# Altium PCB PCB1.PcbDoc
Units mm, origin at the board's own origin, x right, y up, seen from the top; angles counter-clockwise.
Board outline 26.5 x 23.33 mm, 2 copper layers (Top Layer, Bottom Layer); 23 components, 16 nets, 102 pads, 141 vias.
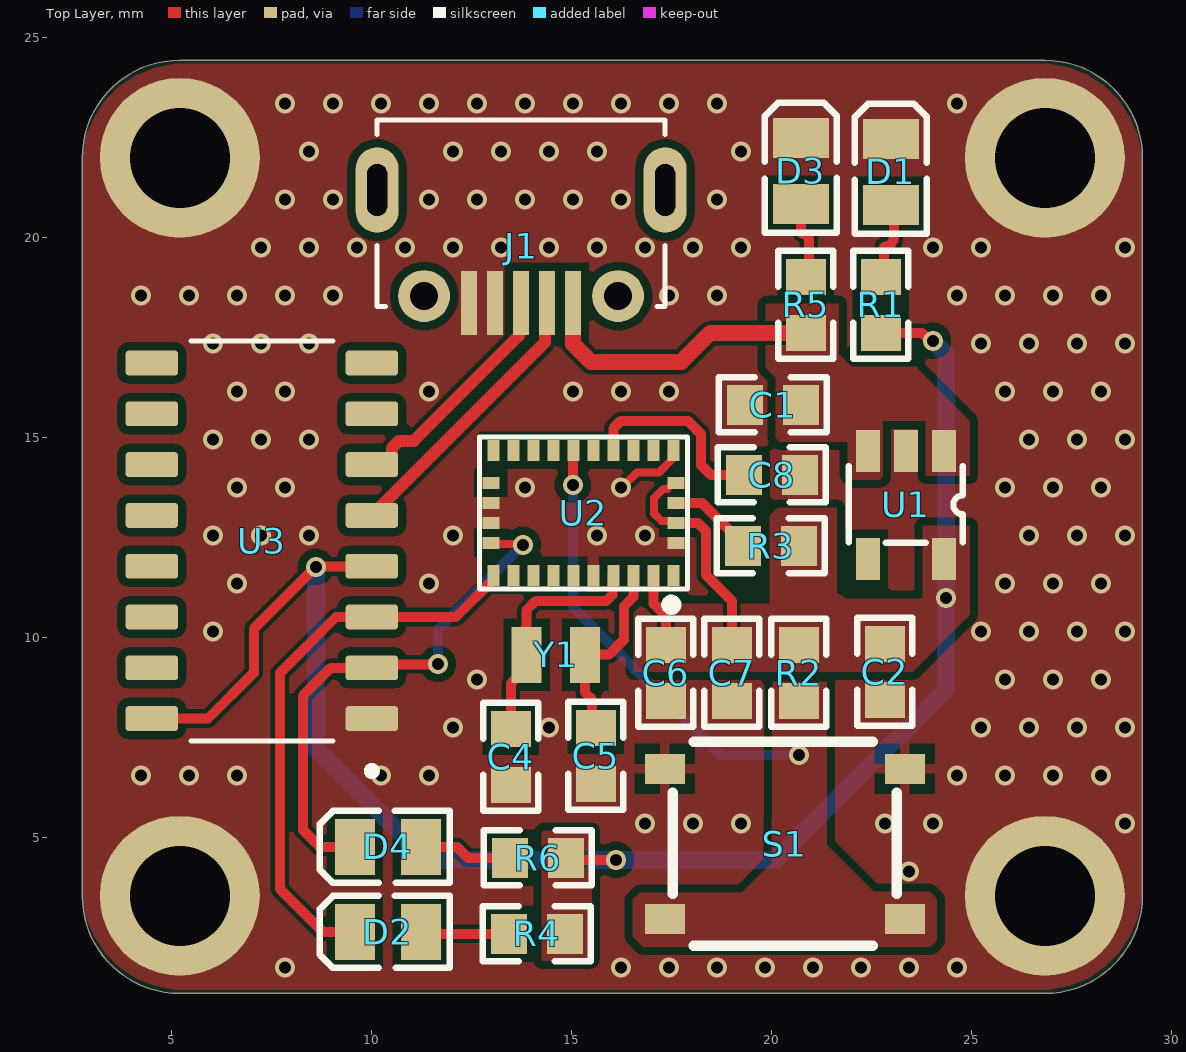
[diagram p0: Top Layer view]
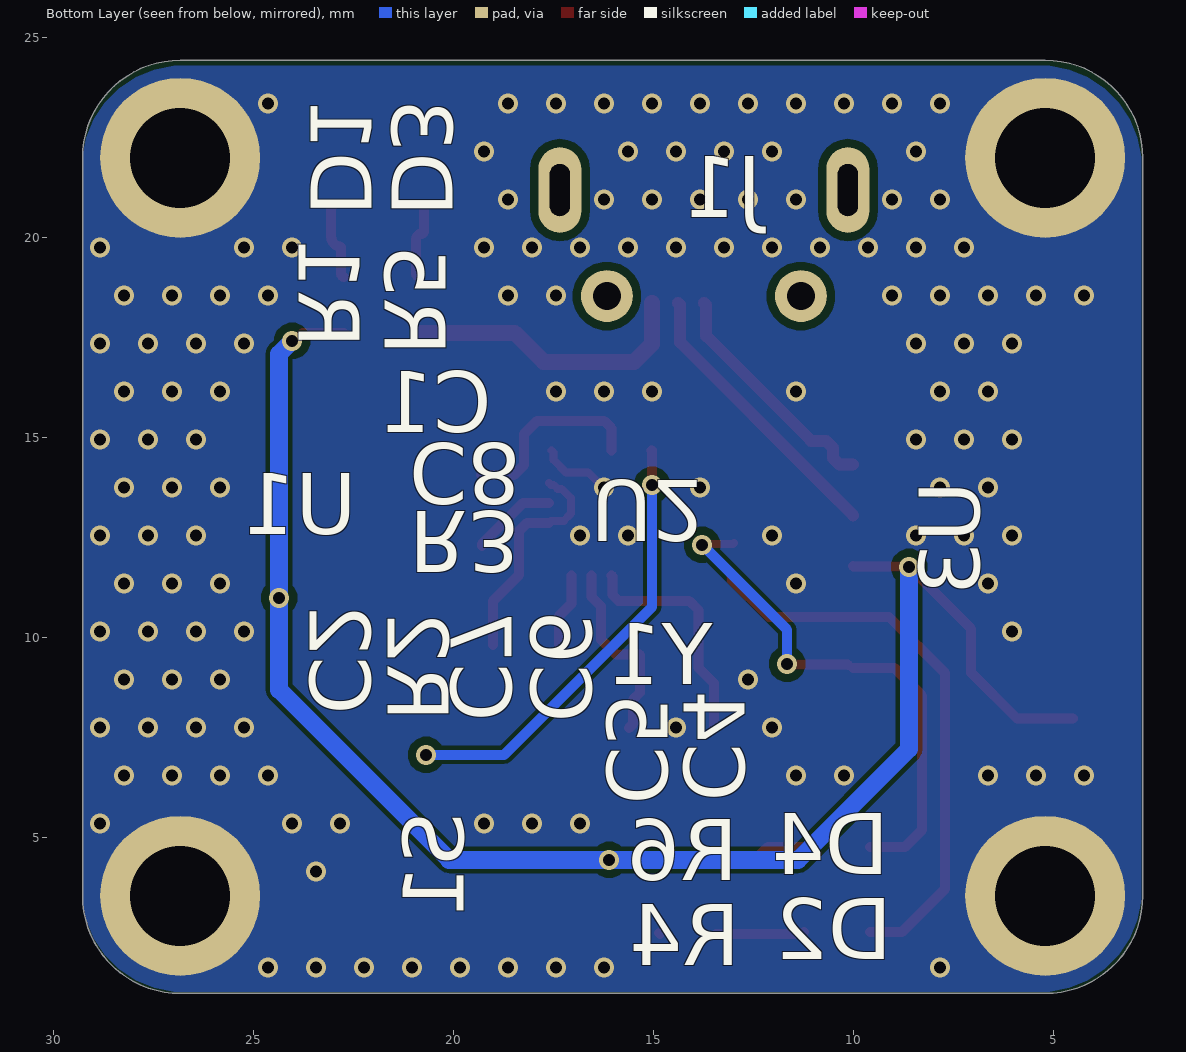
[diagram p1: Bottom Layer view, seen from below]
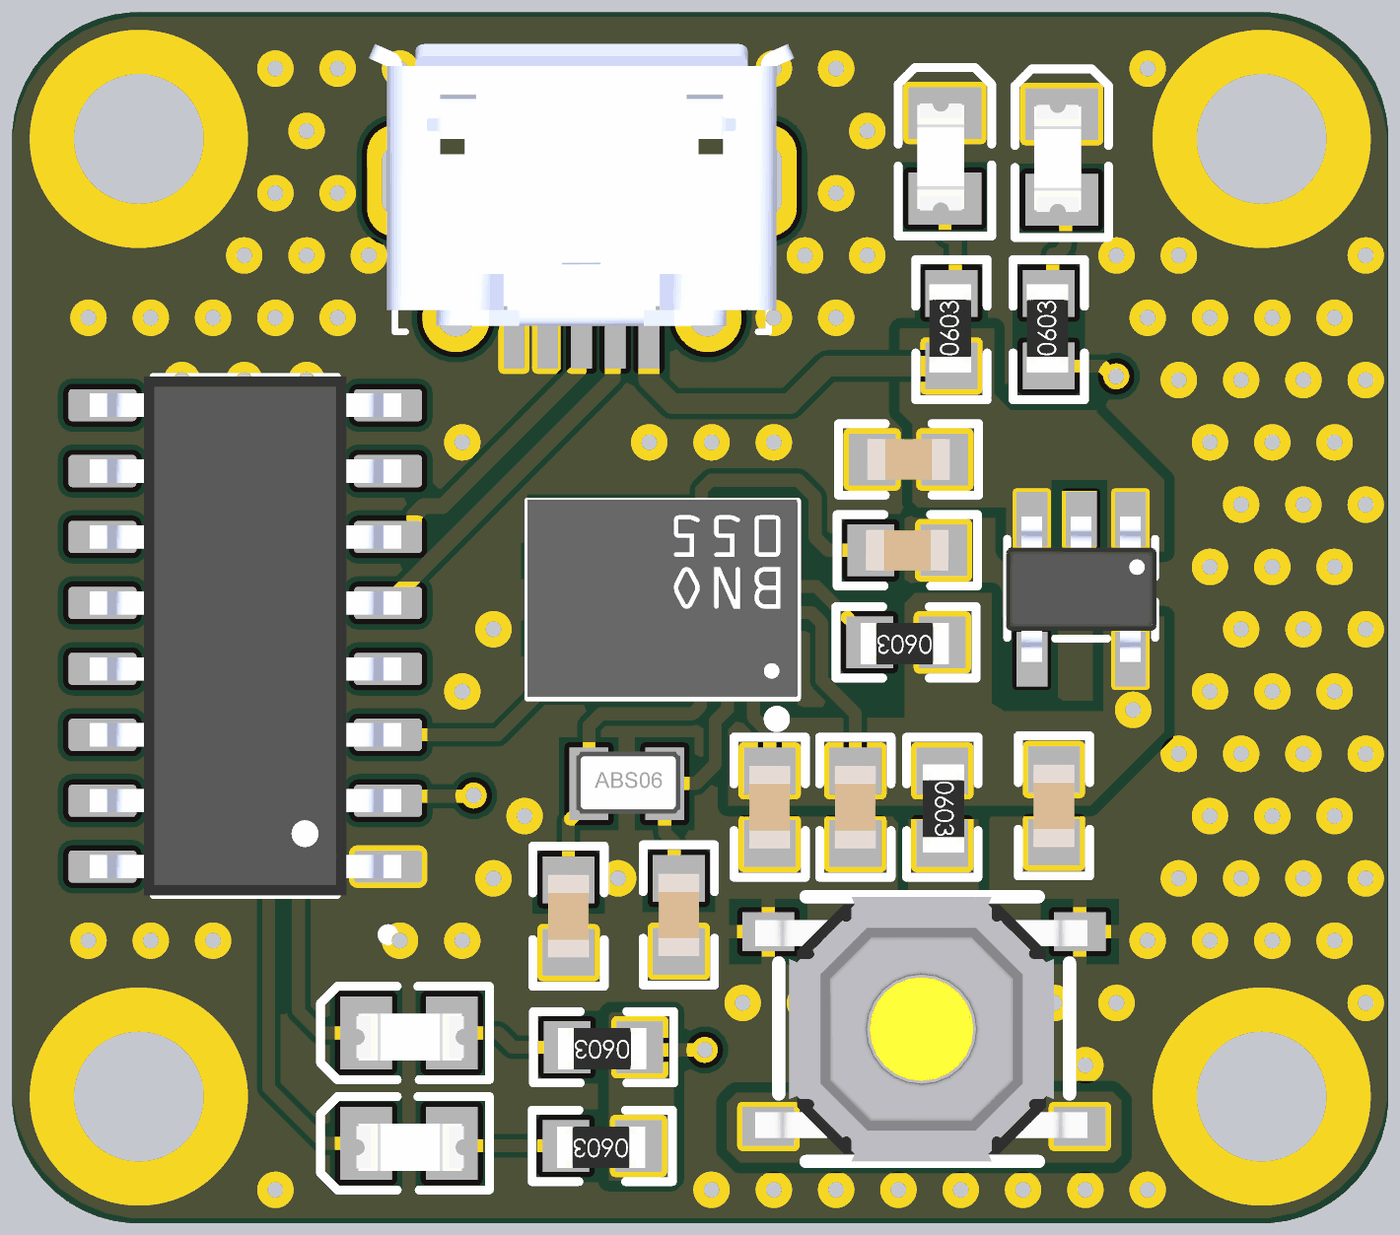
[diagram p2: 3D render of the assembled board from above, using the file's embedded part models]

## Layer stack, top to bottom
Top Solder: solder mask 0.0102, Solder Resist, Dk 3.5
Top Layer: signal copper 0.0356
Dielectric 1: dielectric 0.32, FR-4, Dk 4.8
Bottom Layer: signal copper 0.0356
Bottom Solder: solder mask 0.0102, Solder Resist, Dk 3.5

## Board outline
2.761,3.55 2.761,22 cw(c5.2,22) 5.2,24.439 26.825,24.439 cw(c26.825,22) 29.264,22 29.264,3.55 cw(c26.825,3.55) 26.825,1.111 5.2,1.111 cw(c5.2,3.55)

## Design rules (kind name [scope] priority, off if disabled: settings)
Clearance Clearance_1 [OnMid vs OnMid] p1: gap=0.2 ignorepadtopadclearanceinfootprint=FALSE except(0.1: Arc-SMDPad Arc-THPad Arc-Fill Arc-Poly Arc-Region Track-SMDPad Track-THPad Track-Fill Track-Poly Track-Region SMDPad-Text THPad-Text Fill-Text Poly-Text Region-Text; 0.15: Arc-Hole Track-Hole SMDPad-SMDPad Text-Hole; 0.16: Arc-Arc Arc-Track Arc-Text Track-Track Track-Text Text-Text; 0.254: Hole-Hole) sourcerule=36 cellrowname=All cellrowtype=0 cellcolname=All cellcoltype=0 innerlayers=TRUE
Clearance Clearance_2 [(ExistsOnLayer('Top Layer') Or ExistsOnLayer('Bottom Layer')) vs (ExistsOnLayer('Top Layer') Or ExistsOnLayer('Bottom Layer'))] p2: gap=0.2 ignorepadtopadclearanceinfootprint=FALSE except(0.1: Arc-SMDPad Arc-THPad Arc-Fill Arc-Poly Arc-Region Track-SMDPad Track-THPad Track-Fill Track-Poly Track-Region SMDPad-Text THPad-Text Fill-Text Poly-Text Region-Text; 0.15: Arc-Hole Track-Hole SMDPad-SMDPad Text-Hole; 0.16: Arc-Arc Arc-Track Arc-Text Track-Track Track-Text Text-Text; 0.254: Hole-Hole) sourcerule=36 cellrowname=All cellrowtype=0 cellcolname=All cellcoltype=0 outerlayers=TRUE
Clearance [All] p3: gap=0.254 ignorepadtopadclearanceinfootprint=FALSE ismatrix=TRUE
DiffPairsRouting [All] p1: maxlimit=1 minlimit=0.1 mostfreqgap=0.2 toplayer_minwidth=0.1 toplayer_maxwidth=1 toplayer_prefwidth=0.3 bottomlayer_minwidth=0.1 bottomlayer_maxwidth=1 bottomlayer_prefwidth=0.3 maxuncoupledlength=12.7
MinimumSolderMaskSliver [All] p1: minsoldermaskwidth=0.1
PolygonConnect [All] p1: connectstyle=Direct reliefconductorwidth=0.254 reliefentries=4 polygonreliefangle="90 Angle" airgapwidth=0.254
RoutingVias [All] p1: holewidth=0.3 width=0.5 viastyle="Through Hole" minholewidth=0.3 minwidth=0.5 maxholewidth=0.3 maxwidth=0.5
SolderMaskExpansion [All] p1: expansion=0.102 istentingtop=FALSE
Width [All] p1: maxlimit=1 minlimit=0.16 preferedwidth=0.3 minimp=50.000000 maximp=50.000000 favimp=50.000000
28 further rules are at their usual default settings.

## Classes and differential pairs
differential pair D_D: +D_P -D_N

## Components (designator, comment, footprint, x,y, rotation, side; value= is the part's Value field where it differs from the comment)
C1 "1uF" "0603 cap" 19.925,15.825 r0 top
C2 "1uF" "0603 cap" 22.825,9.05 r90 top
C4 "22pF" "0603 cap" 13.475,6.925 r90 top
C5 "22pF" "0603 cap" 15.6,6.95 r90 top
C6 "100nF" "0603 cap" 17.35,9.025 r90 top
C7 "100nF" "0603 cap" 19,9.025 r90 top
C8 "1uF" "0603 cap" 19.9,14.075 r0 top
D1 "Led green" 0805led 22.975,21.725 r270 top
D2 "Led green" 0805led 10.325,2.65 r0 top
D3 "Led green" 0805led 20.725,21.75 r270 top
D4 "Led green" 0805led 10.325,4.775 r0 top
J1 "4 PINS" "Micro USB" 13.625,20.375 r0 top
R1 "1k" "0603 RES" 22.725,18.225 r90 top
R2 "10k" "0603 RES" 20.675,9.225 r270 top
R3 "10k" "0603 RES" 20.075,12.3 r180 top
R4 "1k" "0603 RES" 14.225,2.6 r180 top
R5 "1k" "0603 RES" 20.85,18.225 r90 top
R6 "1k" "0603 RES" 14.25,4.5 r180 top
S1 "tactile button" button 20.325,4.85 r0 top
U1 "TPTLV74333PDBVR" SOT-23 23.35,13.325 r270 top
U2 "BNO055" LGA28R50P4X10_380X520X100 15.288,13.125 r180 top
U3 "CH340C" "sop 16" 7.25,12.425 r180 top
Y1 "32khz" XTAL_ABS06-107-32.768KHZ-T 14.6,9.575 r0 top

## Footprints (in the part's own frame and the unit in brackets; to place one, negate y for a bottom-side part, rotate by r counter-clockwise, add the part's x,y. Pads: shape width x height; smd on the part's side, far side on the other; paste and mask are expansions set on the pad)
"0603 cap" [mm]
  rect 0.9x1 smd: 1(-0.6,0) 2(0.8,0)
  silkscreen extent -1.25,-0.69 1.45,0.69, body extent -0.7,-0.4 0.9,0.4, height 0.8
"0603 RES" [mm]
  rect 0.9x1 smd: 1(-0.6,0) 2(0.8,0)
  silkscreen extent -1.25,-0.69 1.45,0.69, body extent -0.73,-0.38 0.98,0.43, height 0.56
0805led [mm]
  rect 1x1.4 smd: 1(0.9,0) 2(-0.75,0)
  silkscreen extent -1.63,-0.9 1.63,0.9, body extent -0.93,-0.53 1.13,0.38, height 0.85
button [mm]
  rect 1x0.75 smd: A(-3,1.875) B(3,1.875) C(-3,-1.875) D(3,-1.875)
  silkscreen extent -2.8,-2.55 2.8,2.55, body extent -3.25,-2.55 3.15,2.55, height 1.5
LGA28R50P4X10_380X520X100 [mm]
  rect 0.3x0.525 smd mask+0.05: 1(-2.25,1.562) 6(-2.25,-1.562) 7(-1.75,-1.562) 8(-1.25,-1.562) 9(-0.75,-1.562) 10(-0.25,-1.562) 11(0.25,-1.562) 12(0.75,-1.562) 13(1.25,-1.562) 14(1.75,-1.562) 15(2.25,-1.562) 20(2.25,1.562) 21(1.75,1.562) 22(1.25,1.562) 23(0.75,1.562) 24(0.25,1.562) 25(-0.25,1.562) 26(-0.75,1.562) 27(-1.25,1.562) 28(-1.75,1.562)
  rect 0.425x0.3 smd mask+0.05: 2(-2.312,0.75) 3(-2.312,0.25) 4(-2.312,-0.25) 5(-2.312,-0.75) 16(2.313,-0.75) 17(2.312,-0.25) 18(2.312,0.25) 19(2.313,0.75)
  silkscreen extent -2.6,-1.9 2.6,2.4, body extent -2.6,-1.92 2.6,1.88, height 1.18
"Micro USB" [mm]
  rect 0.4x1.6 smd: 1(1.4,-2) 2(0.75,-2) 3(0.1,-2) 4(-0.55,-2) 5(-1.2,-2)
  round 1.3 hole 0.7: S1(-2.317,-1.831) S2(2.533,-1.831)
  oval 1.07x2.14 hole 0.5 slot 1.3 at 90 deg: S3(-3.492,0.819) S4(3.708,0.819)
  silkscreen extent -3.49,-2.09 3.71,2.57, body extent -4,-1.97 4.2,3.46, height 2.68
"sop 16" [mm]
  rrect25% 1.31x0.62 smd: 1(-2.75,4.445) 2(-2.75,3.175) 3(-2.75,1.905) 4(-2.75,0.635) 5(-2.75,-0.635) 6(-2.75,-1.905) 7(-2.75,-3.175) 8(-2.75,-4.445) 9(2.75,-4.445) 10(2.75,-3.175) 11(2.75,-1.905) 12(2.75,-0.635) 13(2.75,0.635) 14(2.75,1.905) 15(2.75,3.175) 16(2.75,4.445)
  silkscreen extent -2.85,-5 1.78,5.85, body extent -3,-5 3,5, height 1.8
SOT-23 [mm]
  rect 1.05x0.6 smd mask+0.07: 1(-1.35,0.95) 2(-1.35,0) 3(-1.35,-0.95) 4(1.35,-0.95) 5(1.35,0.95)
  silkscreen extent -0.97,-1.43 0.95,1.43, body extent -1.4,-1.45 1.4,1.45, height 1.45
XTAL_ABS06-107-32.768KHZ-T [mm]
  rect 0.75x1.4 smd: 1(-0.73,0) 2(0.73,0)
  body extent -0.98,-0.58 1.03,0.62, height 0.61

## Part data
C1 C2 C8: "25V 1uF X7R ±10% 0603 Multilayer Ceramic Capacitors MLCC - SMD/SMT ROHS", LCSC Part #=C525333, Manufacturer="PSA(Prosperity Dielectrics)", Mfr. Part #=FS18X105K250PBG, supplier=LCSC
C4 C5: library part "22pF capacitor", "50V 22pF C0G ±5% 0603 Multilayer Ceramic Capacitors MLCC - SMD/SMT ROHS", LCSC Part #=C525244, Manufacturer="PSA(Prosperity Dielectrics)", Mfr. Part #=FN18N220J500PSG, supplier=LCSC
C6 C7: library part "100nF capacitor", "50V 100nF X7R ±10% 0603 Multilayer Ceramic Capacitors MLCC - SMD/SMT ROHS", LCSC Part #=C235731, Manufacturer="PSA(Prosperity Dielectrics)", Mfr. Part #=FN18X104K500PBG, supplier=LCSC
D1 D2 D3 D4: "Emerald 0805 Light Emitting Diodes (LED) ROHS", LCSC Part #=C434432, Manufacturer="Yongyu Photoelectric", Mfr. Part #=SZYY0805G, supplier=LCSC
J1: library part "Micro USB", "1.8A USB 2.0 1 Horizontal attachment 5P Mother -20℃~+85℃ Micro-B SMD USB Connectors ROHS", LCSC Part #=C404969, Manufacturer="SHOU HAN", Mfr. Part #=MicroXNJ, supplier=LCSC
R1 R4 R5 R6: library part "1k resistor", "100mW Thick Film Resistors 75V ±100ppm/℃ ±1% 1kΩ 0603 Chip Resistor - Surface Mount ROHS", LCSC Part #=C21190, Manufacturer="UNI-ROYAL(Uniroyal Elec)", Mfr. Part #=0603WAF1001T5E, supplier=LCSC
R2 R3: library part "10k resistor", "100mW Thick Film Resistors 75V ±100ppm/℃ ±1% 10kΩ 0603 Chip Resistor - Surface Mount ROHS", LCSC Part #=C25804, Manufacturer="UNI-ROYAL(Uniroyal Elec)", Mfr. Part #=0603WAF1002T5E, supplier=LCSC
S1: library part Button, "None Without 50mA 5.1mm 100000 Times 160gf 12V 5.1mm 1.5mm Round Button Standing paste SPST SMD Tactile Switches ROHS", LCSC Part #=C318884, Manufacturer="XKB Connection", Mfr. Part #=UK-B0240-R-250, supplier=LCSC
U1: "75dB@(1kHz) 300mA Fixed 3.3V Positive electrode 5.5V SOT-23-5 Voltage Regulators - Linear, Low Drop Out (LDO) Regulators ROHS", LCSC Part #=C3021096, Manufacturer="TECH PUBLIC", Mfr. Part #=TPTLV74333PDBVR, supplier=LCSC
U2: "LGA-28(3.8x5.2) Accelerometers ROHS", LCSC Part #=C93216, Manufacturer="Bosch Sensortec", Mfr. Part #=BNO055, supplier=LCSC
U3: "2Mbps Transceiver USB 2.0 SOP-16 USB ICs ROHS", LCSC Part #=C84681, Manufacturer=WCH, Mfr. Part #=CH340C, supplier=LCSC
Y1: "32.768kHz 6pF ±10ppm SMD2012-2P Crystals ROHS", LCSC Part #=C3015107, Manufacturer="Abracon LLC", Mfr. Part #=ABS06-32.768KHZ-6-1-T, supplier=LCSC

## Free pads (board coordinates)
  round 4 hole 2.5: 1(26.825,22) 2(5.2,22) 4(5.2,3.55) 5(26.825,3.55)

## Via types
v1: diameter 0.5, hole 0.3, Top Layer to Bottom Layer, 141 vias

## Nets (pads, with @x,y where several pads share a name; then routed paths per layer and width w, separated by ;. In a path a pad name is that pad's centre, name@x,y a point inside that pad or via, vN(x,y) a via of type N, cw(c..) or ccw(c..) an arc to the next point about the centre after c; other vN are vias at no path point)
3V3: C2.2 C6.2 C7.2 R1.1 R2.1 R3.1 R4.1 R6.1 U1.5 U2.3 U2.5 U2.28 U3.4 U3.16 | length 50
  Top Layer w0.2: U2.3 17.55,12.925 17.237,12.925 17.058,13.104 17.058,13.489 17.294,13.725 17.387,13.725 17.487,13.825 17.55,13.825 U2.5
  Top Layer w0.25: U3.16 5.905,7.98 7.05,9.125 7.05,10.225 v1(8.6,11.775) 8.607,11.782 9.992,11.782 U3.4 ; R4.1 R4.1@14.85,2.625 ; R6.1 14.9,4.45 v1(16.1,4.45) ; U2.28 17.038,10.862 17.35,10.55 C6.2 ; U2.3 18.15,12.875 18.35,12.675 18.35,11.575 19,10.925 C7.2 ; R1.1 23.757,17.625 23.957,17.425 v1(24.025,17.425)
  Bottom Layer w0.45: v1(8.6,11.775) 8.6,7.225 11.375,4.45 v1(16.1,4.45) 20.1,4.45 24.35,8.7 v1(24.35,11) 24.35,17.1 v1(24.025,17.425)
D_N: J1.3 U3.6 | length 6
  Top Layer w0.3: U3.6 10.345,14.33 10.505,14.49 10.505,14.749 10.681,14.925 11.05,14.925 13.675,17.55 13.675,18.325 J1.3
D_P: J1.2 U3.5 | length 7.1
  Top Layer w0.3: U3.5 10.71,13.77 10.713,13.77 14.328,17.385 14.328,18.328 J1.2
GND: C1.1 C2.1 C4.1 C5.1 C6.1 C7.1 C8.2 D1.2 D3.2 J1.4 J1.5 pad.1 pad.2 pad.4 pad.5 S1.A S1.B U1.2 U2.2 U2.6 U2.17 U2.18 U2.25 U3.1 | length 1.8
  Top Layer w0.2: v1(16.23,13.754) 16.246,13.754 16.627,14.135 17.18,14.135 17.488,14.442 17.488,14.637 U2.6
  other v1: 7.83,1.754 16.23,1.754 17.43,1.754 18.63,1.754 19.83,1.754 21.03,1.754 22.23,1.754 23.43,1.754 24.63,1.754 23.43,4.154 16.83,5.354 18.03,5.354 19.23,5.354 22.83,5.354 24.03,5.354 28.83,5.354 4.23,6.554 5.43,6.554 6.63,6.554 10.23,6.554 11.43,6.554 24.63,6.554 25.83,6.554 27.03,6.554 28.23,6.554 12.03,7.754 14.43,7.754 25.23,7.754 26.43,7.754 27.63,7.754 28.83,7.754 12.63,8.954 25.83,8.954 27.03,8.954 28.23,8.954 6.03,10.154 25.23,10.154 26.43,10.154 27.63,10.154 28.83,10.154 6.63,11.354 11.43,11.354 25.83,11.354 27.03,11.354 28.23,11.354 6.03,12.554 7.23,12.554 8.43,12.554 12.03,12.554 15.63,12.554 16.83,12.554 26.43,12.554 27.63,12.554 28.83,12.554 6.63,13.754 7.83,13.754 13.83,13.754 25.83,13.754 27.03,13.754 28.23,13.754 6.03,14.954 7.23,14.954 8.43,14.954 26.43,14.954 27.63,14.954 28.83,14.954 6.63,16.154 7.83,16.154 11.43,16.154 15.03,16.154 16.23,16.154 17.43,16.154 25.83,16.154 27.03,16.154 28.23,16.154 6.03,17.354 7.23,17.354 8.43,17.354 25.23,17.354 26.43,17.354 27.63,17.354 28.83,17.354 4.23,18.554 5.43,18.554 6.63,18.554 7.83,18.554 9.03,18.554 17.43,18.554 18.63,18.554 24.63,18.554 25.83,18.554 27.03,18.554 28.23,18.554 7.23,19.754 8.43,19.754 9.63,19.754 10.83,19.754 12.03,19.754 13.23,19.754 14.43,19.754 15.63,19.754 16.83,19.754 18.03,19.754 19.23,19.754 24.03,19.754 25.23,19.754 28.83,19.754 7.83,20.954 9.03,20.954 11.43,20.954 12.63,20.954 13.83,20.954 15.03,20.954 16.23,20.954 18.63,20.954 8.43,22.154 12.03,22.154 13.23,22.154 14.43,22.154 15.63,22.154 19.23,22.154 7.83,23.354 9.03,23.354 10.23,23.354 11.43,23.354 12.63,23.354 13.83,23.354 15.03,23.354 16.23,23.354 17.43,23.354 18.63,23.354 24.63,23.354
NetC8_1: C8.1 U2.9 | length 4.9
  Top Layer w0.25: U2.9 16.038,15.238 16.225,15.425 17.9,15.425 18.225,15.1 18.225,14.325 18.475,14.075 C8.1
NetD1_1: D1.1 R1.2 | length 2
  Top Layer w0.25: R1.2 ccw(c22.725,19.1) 22.8,19.1 22.8,19.775 ccw(c22.8,20.025) 23.05,20.025 23.05,20.75 ccw(c22.975,20.75) D1.1
NetD2_1: D2.1 R4.2 | length 2.2
  Top Layer w0.25: D2.1 11.275,2.6 R4.2
NetD3_1: D3.1 R5.2 | length 2
  Top Layer w0.25: D3.1 20.725,20.175 ccw(c20.8,20.175) 20.8,20.1 cw(c20.8,19.975) 20.925,19.975 20.925,19.1 cw(c20.85,19.1) R5.2
NetD4_1: D4.1 R6.2 | length 2.3
  Top Layer w0.25: D4.1 12.125,4.775 12.4,4.5 R6.2
NetR3_2: R3.2 U2.4 | length 2.1
  Top Layer w0.25: U2.4 18.25,13.375 19.275,12.35 R3.2
RESET: R2.2 S1.C S1.D U2.11 | length 11.1
  Top Layer w0.25: v1(15.025,13.825) 15.031,13.831 15.031,14.681 U2.11
  Bottom Layer w0.25: v1(15.025,13.825) 15.025,10.775 18.725,7.075 v1(20.675,7.075)
RX_3V: D4.2 U2.19 U3.2 | length 13.1
  Top Layer w0.2: U2.19 13,12.35 13.75,12.35 v1(13.775,12.325)
  Top Layer w0.25: D4.2 8.7,4.775 8.275,5.2 8.275,8.55 8.975,9.25 U3.2 ; U3.2@10.125,9.325 10.137,9.337 11.638,9.337 v1(11.65,9.35)
  Bottom Layer w0.25: v1(11.65,9.35) 11.65,10.2 v1(13.775,12.325)
TX_3V: D2.2 U2.20 U3.3 | length 14.1
  Top Layer w0.25: D2.2 8.775,2.65 7.7,3.725 7.7,9.115 9.105,10.52 U3.3 12.107,10.52 13.037,11.45 U2.20
Vin: C1.2 J1.1 R5.1 U1.1 U1.3 | length 7.3
  Top Layer w0.4: J1.1 15.025,17.35 15.475,16.9 17.74,16.9 18.465,17.625 R5.1
Xin: C5.2 U2.27 Y1.2 | length 4.8
  Top Layer w0.25: C5.2 15.51,7.84 15.51,8.45 15.33,8.63 Y1.2 15.339,9.584 15.934,9.584 16.3,9.95 16.3,10.779 16.538,11.017 U2.27
Xout: C4.2 U2.26 Y1.1 | length 5.9
  Top Layer w0.25: C4.2 13.475,8.855 13.87,9.25 Y1.1 13.87,10.695 14.1,10.925 15.866,10.925 16.013,11.071 16.013,11.538 U2.26
pads on no net: J1.S1 J1.S2 J1.S3 J1.S4 U1.4 U2.1 U2.7 U2.8 U2.10 U2.12 U2.13 U2.14 U2.15 U2.16 U2.21 U2.22 U2.23 U2.24 U3.7 U3.8 U3.9 U3.10 U3.11 U3.12 U3.13 U3.14 U3.15

## Polygon pours and split planes (outlines as drawn)
GND on Top Layer "GND_L01_P007" (solid, pour order 7): 26.704,24.355 cw(c26.704,21.815) 29.244,21.815 29.244,3.745 cw(c26.704,3.745) 26.704,1.205 5.314,1.205 cw(c5.308,3.745) 2.769,3.745 2.769,21.815 cw(c5.309,21.815) 5.309,24.355 5.394,24.355
3V3 on Top Layer "3V3_L01_P003" (solid, pour order 3): 14.25,5.125 14.3,5.175 15.5,5.175 15.5,1.975 15.45,1.925 14.25,1.925
RESET on Top Layer "RESET_L01_P002" (solid, pour order 2): 20.025,8.9 21.375,8.9 21.375,4.825 22.55,3.65 23.95,3.65 24.125,3.475 24.125,2.425 23.975,2.275 16.775,2.275 16.525,2.525 16.525,3.45 16.7,3.625 19.25,3.625 20,4.375
Vin on Top Layer "VIN_L01_P001" (solid, pour order 1): 23.85,14.05 24.95,14.05 24.95,15.425 23.65,16.725 23.65,16.775 22,16.775 21.675,17.1 21.675,18.35 19.875,18.35 19.85,18.325 19.85,16.75 20.1,16.5 20.1,15 20.2,14.9 21.9,14.9 21.9,14.075 22.025,13.95 22.7,13.95 22.775,14.025 22.775,15.425 23.85,15.425
3V3 on Top Layer "3V3_L01_P000" (solid, pour order 0): 23.775,12.8 24.95,12.8 24.95,10.575 23.525,9.15 16.55,9.15 16.55,10.625 16.775,10.85 19.95,10.85 19.95,13.05 20.15,13.25 21.625,13.25 21.625,11.125 21.875,10.975 21.975,10.975 23.775,10.975
GND on Bottom Layer "GND_L02_P006" (solid, pour order 6): 26.735,24.3 cw(c26.735,21.76) 29.275,21.76 29.275,3.69 cw(c26.735,3.69) 26.735,1.15 5.34,1.15 cw(c5.34,3.69) 2.8,3.69 2.8,21.76 cw(c5.34,21.76) 5.34,24.3 5.425,24.3

## Silkscreen, mask and mechanical layers (free items; w line width, h text height)
Mechanical 1:
  the board outline again, w0.254